# Altium PCB QUTMS-BrakeLight--B00-V00.PcbDoc
Units mil, origin at the board's own origin, x right, y up, seen from the top; angles counter-clockwise.
Board outline 4118.11 x 2444.88 mil, 2 copper layers (Top Layer, Bottom Layer); 33 components, 18 nets, 208 pads, 2 vias.
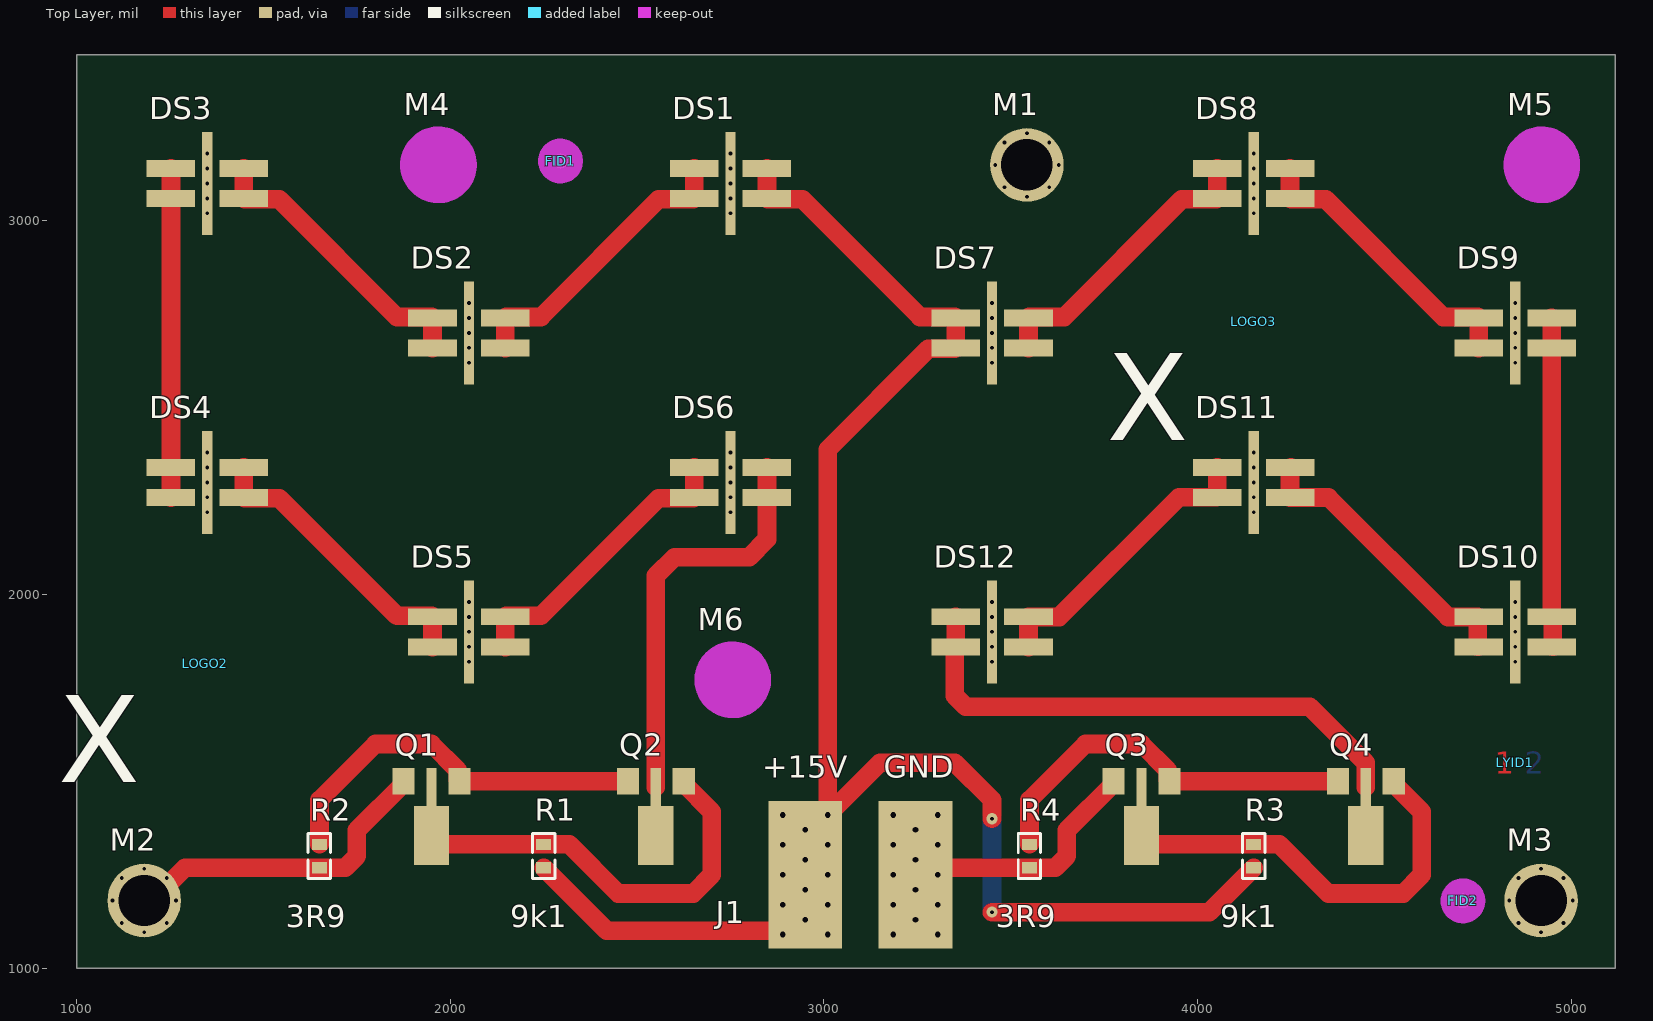
[diagram p0: Top Layer view]
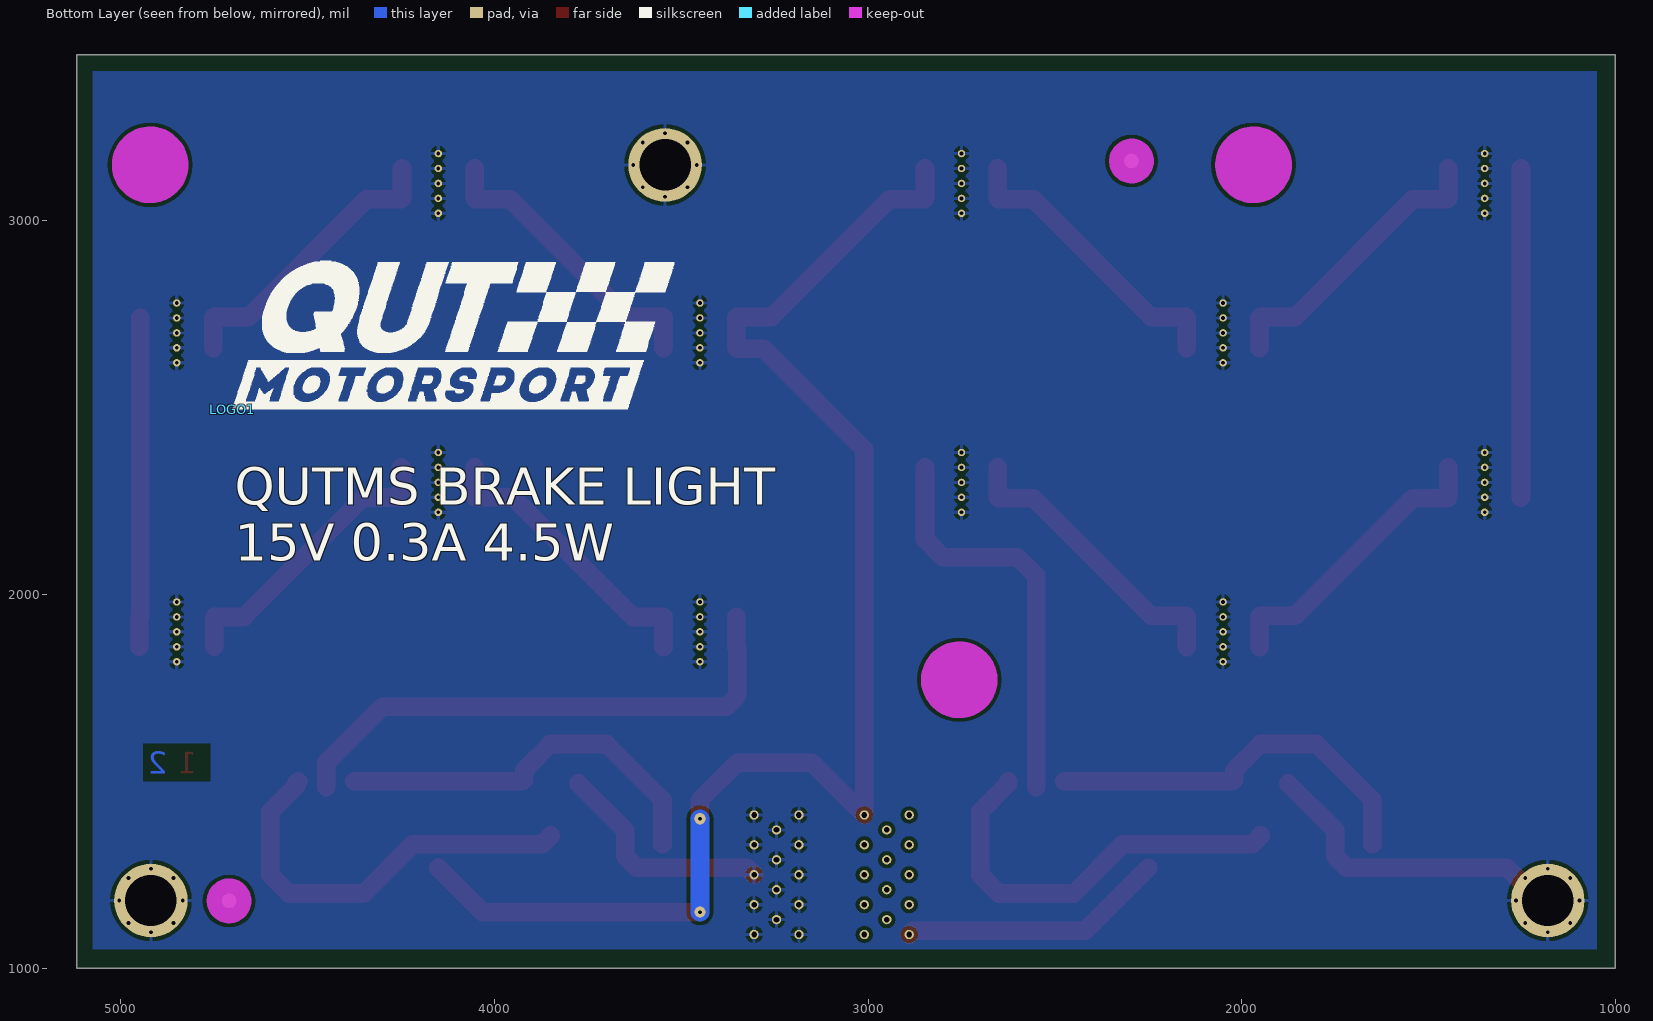
[diagram p1: Bottom Layer view, seen from below]
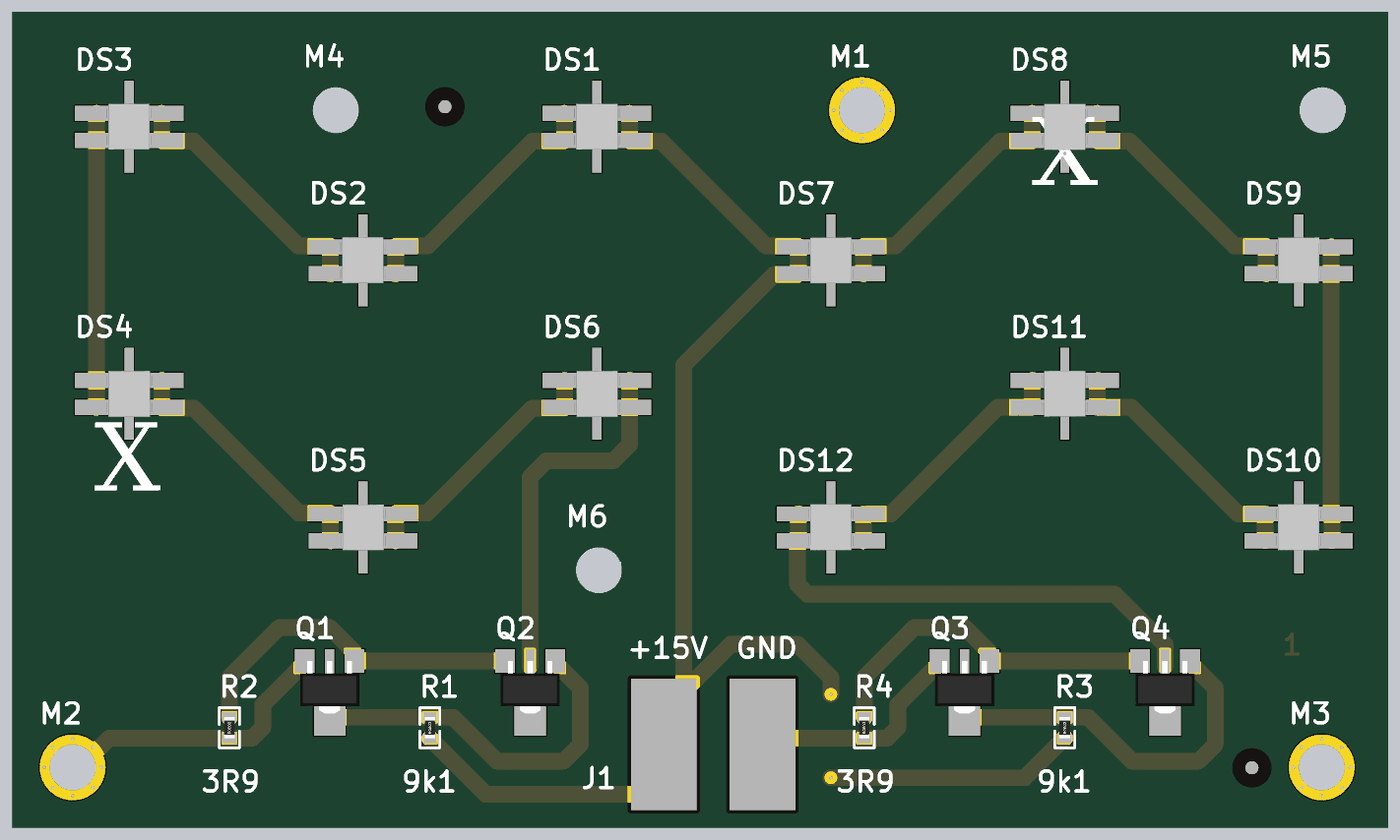
[diagram p2: 3D render of the assembled board from above, using the file's embedded part models]

## Layer stack, top to bottom
Top Solder: solder mask 0.4, Solder Resist, Dk 3.5
Top Layer: signal copper 1.4
Dielectric 1: dielectric 12.6, FR-4, Dk 4.8
Bottom Layer: signal copper 1.4
Bottom Solder: solder mask 0.4, Solder Resist, Dk 3.5

## Board outline
1000,1000 1000,3444.88 5118.11,3444.88 5118.11,1000

## Design rules (kind name [scope] priority, off if disabled: settings)
Clearance [All] p1: gap=10 ignorepadtopadclearanceinfootprint=FALSE except(0: Arc-Hole Track-Hole SMDPad-Hole THPad-Hole Via-Hole Fill-Hole Poly-Hole Region-Hole Text-Hole)
PolygonConnect [All] p1: connectstyle=Relief reliefconductorwidth=10 reliefentries=4 polygonreliefangle="90 Angle" airgapwidth=10
RoutingVias [All] p1: holewidth=28 width=50 viastyle="Through Hole" minholewidth=28 minwidth=50 maxholewidth=28 maxwidth=50
SolderMaskExpansion [All] p1: expansion=4 istentingtop=FALSE
Width [All] p1: maxlimit=100 minlimit=10 preferedwidth=50 minimp=50.000000 maximp=50.000000 favimp=50.000000
30 further rules are at their usual default settings.

## Components (designator, comment, footprint, x,y, rotation, side; value= is the part's Value field where it differs from the comment)
DS1 "Cree XLamp ML-E Red" "CREE XLAMP ML-E" 2750,3100 r180 top
DS2 "Cree XLamp ML-E Red" "CREE XLAMP ML-E" 2050,2700 r180 top
DS3 "Cree XLamp ML-E Red" "CREE XLAMP ML-E" 1350,3100 r180 top
DS4 "Cree XLamp ML-E Red" "CREE XLAMP ML-E" 1350,2300 r0 top
DS5 "Cree XLamp ML-E Red" "CREE XLAMP ML-E" 2050,1900 r0 top
DS6 "Cree XLamp ML-E Red" "CREE XLAMP ML-E" 2750,2300 r0 top
DS7 "Cree XLamp ML-E Red" "CREE XLAMP ML-E" 3450,2700 r0 top
DS8 "Cree XLamp ML-E Red" "CREE XLAMP ML-E" 4150,3100 r0 top
DS9 "Cree XLamp ML-E Red" "CREE XLAMP ML-E" 4850,2700 r0 top
DS10 "Cree XLamp ML-E Red" "CREE XLAMP ML-E" 4850,1900 r180 top
DS11 "Cree XLamp ML-E Red" "CREE XLAMP ML-E" 4150,2300 r180 top
DS12 "Cree XLamp ML-E Red" "CREE XLAMP ML-E" 3450,1900 r180 top
FID1 "Fiducial 1MM" "FIDUCIAL 1MM" 2295,3160 r0 top
FID2 "Fiducial 1MM" "FIDUCIAL 1MM" 4710,1180 r90 top
J1 "15V Input" JUMPER_2WAY_LARGE_SOLDER_PAD 2950,1250 r0 top
LOGO1 "30mm Wide QUTMS Logo" "QUTMS LOGO 30MM" 4700,2495 r180 bottom
LOGO2 "LBL Hot Surface M + TXT" "LBL HOT MEDIUM TXT" 1345,1815 r0 top
LOGO3 "LBL Hot Surface M + TXT" "LBL HOT MEDIUM TXT" 4150,2730 r0 top
LYID1 "2 Layer Identification PCB Marker" "LAYER IDENT 2" 4850,1550 r0 top
M1 "Hole M3 Loose Plated" "M3.5 PLATED" 3543.31,3149.61 r0 top
M2 "Hole M3 Loose Plated" "M3.5 PLATED" 1181.1,1181.1 r0 top
M3 "Hole M3 Loose Plated" "M3.5 PLATED" 4919,1181.1 r0 top
M4 "Hole M3 Loose Unplated" "M3.5 UNPLATED" 1968.5,3149.61 r0 top
M5 "Hole M3 Loose Unplated" "M3.5 UNPLATED" 4921.26,3149.61 r0 top
M6 "Hole M3 Loose Unplated" "M3.5 UNPLATED" 2755.91,1771.65 r0 top
Q1 "BCX55-16TF" SOT89 1950,1500 r180 top
Q2 "BCX55-16TF" SOT89 2550,1500 r180 top
Q3 "BCX55-16TF" SOT89 3850,1500 r180 top
Q4 "BCX55-16TF" SOT89 4450,1500 r180 top
R1 "9k1 5% 0603" Res_ThinFilm_0603 2250,1300 r90 top
R2 "3R9 5% 0603" Res_ThinFilm_0603 1650,1300 r90 top
R3 "9k1 5% 0603" Res_ThinFilm_0603 4150,1300 r90 top
R4 "3R9 5% 0603" Res_ThinFilm_0603 3550,1300 r90 top

## Footprints (in the part's own frame and the unit in brackets; to place one, negate y for a bottom-side part, rotate by r counter-clockwise, add the part's x,y. Pads: shape width x height; smd on the part's side, far side on the other; paste and mask are expansions set on the pad)
"CREE XLAMP ML-E" [mil]
  rect 129.92x45.28 smd: A1(-97.44,40.35) A2(-97.44,-40.35) K1(97.44,40.35) K2(97.44,-40.35)
  rect 27.56x275.59 smd: HS(0,0)
  round 20 hole 10: HS(0,80) HS(0,40) HS(0,0) HS(0,-40) HS(0,-80)
  body extent -68,-69 68,69, height 45
"FIDUCIAL 1MM" [mm]
  round 1 smd mask+1: 1(0,0)
  round 1 smd far side mask+1: 1(0,0)
  Keep-Out Layer circle w1.524: c0,0 r0.762
JUMPER_2WAY_LARGE_SOLDER_PAD [mil]
  round 25 hole 15: 1(-60,-160) 1(-60,-80) 1(-60,0) 1(-60,80) 1(-60,160) 1(0,-120) 1(0,-40) 1(0,40) 1(0,120) 1(60,-160) 1(60,-80) 1(60,0) 1(60,80) 1(60,160) 2(235,-160) 2(235,-80) 2(235,0) 2(235,80) 2(235,160) 2(295,-120) 2(295,-40) 2(295,40) 2(295,120) 2(355,-160) 2(355,-80) 2(355,0) 2(355,80) 2(355,160)
  rect 196.85x393.7 smd mask+10: 1(0,0) 2(295,0)
"LAYER IDENT 2" [mil]
  Top Layer pour cut-out: 190,150
  Top Layer pour cut-out: -90,50 -90,-50 90,-50 90,50
  Top Layer pour cut-out: -10,30
  Top Layer pour cut-out: -20,-5
  Bottom Layer pour cut-out: -90,50 -90,-50 90,-50 90,50
"LBL HOT MEDIUM TXT" [mil]
"M3.5 PLATED" [mil]
  round 20 hole 10: 1(-85,0) 1(-60,-60) 1(-60,60) 1(0,-85) 1(0,85) 1(60,-60) 1(60,60) 1(85,0)
  round 196.85 hole 137.8: 1(0,0)
"M3.5 UNPLATED" [mm]
  round 0 hole 3.5 unplated: 1(0,0)
  Keep-Out Layer circle w2.667: c0,0 r1.27
"QUTMS LOGO 30MM" [mil]
  silkscreen extent -1,1 1182,398
Res_ThinFilm_0603 [mil]
  rect 30x40 smd: 1(-31.24,0) 2(31.24,0)
  silkscreen extent -60,-30 60,30, body extent -31,-16 32,16, height 18
SOT89 [mm]
  rect 1.5x1.8 smd: B3(-1.9,0) E1(1.9,0)
  rect 2.4x4 smd: C2(0,3.683)
  rect 0.7x2.6 smd: C2(0,0.4)
  body extent -2.25,0 2.25,4, height 1.5

## Part data
DS1 DS2 DS3 DS4 DS5 DS6 DS7 DS8 DS9 DS10 DS11 DS12: "MLERED-A1-0000-000V01 -  High Brightness LED, XLamp ML-E Series, Red, 630 nm, 125 °, 18.1 lm, 350 mA"
J1: library part "Jumper 2Way Side Large Solder Pad", "Jumper 2Way Side Large Solderable Pad"
LOGO1: library part "QUTMS Logo 30mm"
LYID1: library part "Layer Identification 2"
M1 M2 M3: "M3.5 Hole, Plated"
M4 M5 M6: "M3.5 Hole, No Plating"
Q1 Q2 Q3 Q4: library part "BJT NPN Transistor", "BCX55-16TF -  Bipolar (BJT) Single Transistor, NPN, 60 V, 155 MHz, 500 mW, 1 A, 100 hFE", ComponentLink1Description=Element14, ComponentLink1URL=https://au.element14.com/nexperia/bcx55-16tf/trans-aec-q101-npn-60v-1a-150deg/dp/3268016
R1 R3: "Resistor, SMD, 9k1, 0.1W, 5%, 0603"
R2 R4: "Resistor, SMD, 3R9, 0.1W, 5%, 0603"

## Via types
v1: diameter 30, hole 10, Top Layer to Bottom Layer, 2 vias

## Nets (pads, with @x,y where several pads share a name; then routed paths per layer and width w, separated by ;. In a path a pad name is that pad's centre, name@x,y a point inside that pad or via, vN(x,y) a via of type N, cw(c..) or ccw(c..) an arc to the next point about the centre after c; other vN are vias at no path point)
+15V: DS1.A1 DS1.A2 DS7.A1 DS7.A2 J1.1 R1.1 R3.1 | length 4534.5
  Top Layer w50: R1.1 2418.76,1100 2880,1100 J1.1@2890,1090 ; DS1.A2 DS1.A1 2849.8,3057.28 2942.72,3057.28 3257.28,2742.72 3350.2,2742.72 DS7.A1 DS7.A2 3350.2,2657.28 3279.29,2657.28 3010,2387.99 3010,1410 3150,1550 3350,1550 3450,1450 v1(3450,1400) ; v1(3450,1150) 4031.24,1150 R3.1
  Bottom Layer w50: v1(3450,1150) v1(3450,1400)
GND: DS1.HS DS2.HS DS3.HS DS4.HS DS5.HS DS6.HS DS7.HS DS8.HS DS9.HS DS10.HS DS11.HS DS12.HS J1.2 M1.1 M2.1 M3.1 Q1.E1 Q3.E1 R2.1 R4.1 | length 1487.6
  Top Layer w20: Q1.E1@1875.2,1494.09 Q1.E1 ; Q3.E1@3775.2,1494.09 Q3.E1
  Top Layer w50: M2.1@1181.1,1181.1 1202.46,1181.1 1290.12,1268.76 R2.1 1718.76,1268.76 1750,1300 1750,1368.9 Q1.E1@1875.2,1494.09 ; J1.2@3305,1250 3323.76,1268.76 R4.1 3618.76,1268.76 3650,1300 3650,1368.9 Q3.E1@3775.2,1494.09
NetDS1_K1: DS1.K1 DS1.K2 DS2.A1 DS2.A2 | length 798.8
  Top Layer w50: DS2.A1 DS2.A2 2149.8,2742.72 2242.72,2742.72 2557.28,3057.28 2650.2,3057.28 DS1.K1 DS1.K2
NetDS2_K1: DS2.K1 DS2.K2 DS3.A1 DS3.A2 | length 798.8
  Top Layer w50: DS3.A2 DS3.A1 1449.8,3057.28 1542.72,3057.28 1857.28,2742.72 1950.2,2742.72 DS2.K2 DS2.K1
NetDS3_K1: DS3.K1 DS3.K2 DS4.A1 DS4.A2 | length 880.7
  Top Layer w50: DS4.A2 DS4.A1 DS3.K1 DS3.K2
NetDS4_K1: DS4.K1 DS4.K2 DS5.A1 DS5.A2 | length 798.8
  Top Layer w50: DS4.K1 DS4.K2 1449.8,2257.28 1542.72,2257.28 1857.28,1942.72 1950.2,1942.72 DS5.A1 DS5.A2
NetDS5_K1: DS5.K1 DS5.K2 DS6.A1 DS6.A2 | length 798.8
  Top Layer w50: DS5.K2 DS5.K1 2149.8,1942.72 2242.72,1942.72 2557.28,2257.28 2650.2,2257.28 DS6.A2 DS6.A1
NetDS6_K1: DS6.K1 DS6.K2 Q2.C2 | length 1096.5
  Top Layer w50: Q2.C2@2550,1484.25 2550,2050 2600,2100 2800,2100 2847.44,2147.44 DS6.K2 DS6.K1
NetDS7_K1: DS7.K1 DS7.K2 DS8.A1 DS8.A2 | length 798.8
  Top Layer w50: DS7.K2 DS7.K1 3549.8,2742.72 3642.72,2742.72 3957.28,3057.28 4050.2,3057.28 DS8.A2 DS8.A1
NetDS8_K1: DS8.K1 DS8.K2 DS9.A1 DS9.A2 | length 798.8
  Top Layer w50: DS8.K1 DS8.K2 4249.8,3057.28 4342.72,3057.28 4657.28,2742.72 4750.2,2742.72 DS9.A1 DS9.A2
NetDS9_K1: DS9.K1 DS9.K2 DS10.A1 DS10.A2 | length 881.4
  Top Layer w50: DS9.K1 DS9.K2 4947.44,1942.56 4950,1940 DS10.A1@4950,1860
NetDS10_K1: DS10.K1 DS10.K2 DS11.A1 DS11.A2 | length 796.4
  Top Layer w50: DS11.A2@4250,2340 4247.44,2337.44 DS11.A1 4350.35,2259.65 4670,1940 4750,1940 DS10.K1@4750,1860
NetDS11_K1: DS11.K1 DS11.K2 DS12.A1 DS12.A2 | length 797.7
  Top Layer w50: DS12.A1 DS12.A2 3547.8,1940 3630,1940 3950,2260 4050.55,2260 4052.56,2262.01 DS11.K2
NetDS12_K1: DS12.K1 DS12.K2 Q4.C2 | length 1452.3
  Top Layer w50: DS12.K2 DS12.K1 3352.36,1859.65 3350,1857.28 3350,1729.29 3379.29,1700 4300,1700 4450,1550 Q4.C2@4450,1484.25
NetQ1_B3: Q1.B3 Q2.E1 R2.2 | length 1062.3
  Top Layer w50: R2.2 1650,1450 1800,1600 1950,1600 2020.28,1529.72 2020.28,1504.53 Q1.B3 Q2.E1
NetQ1_C2: Q1.C2 Q2.B3 R1.2 | length 1117
  Top Layer w50: Q1.C2@1950,1355 1950,1353.48 1972.24,1331.24 R1.2 2318.76,1331.24 2450,1200 2650,1200 2700,1250 2700,1418.9 2624.8,1494.09 Q2.B3
NetQ3_B3: Q3.B3 Q4.E1 R4.2 | length 1062.3
  Top Layer w50: R4.2 3550,1450 3700,1600 3850,1600 3920.28,1529.72 3920.28,1504.53 Q3.B3 Q4.E1
NetQ3_C2: Q3.C2 Q4.B3 R3.2 | length 1117
  Top Layer w50: Q3.C2@3850,1355 3850,1353.48 3872.24,1331.24 R3.2 4218.76,1331.24 4350,1200 4550,1200 4600,1250 4600,1418.9 4529.33,1489.57 4529.33,1495.47 Q4.B3
pads on no net: FID1.1 FID2.1 M4.1 M5.1 M6.1

## Polygon pours and split planes (outlines as drawn)
GND on Bottom Layer "GND_L02_P001" (solid, pour order 1): 5075,1050 5075,3400 1050,3400 1050,1050
no net on Bottom Layer "NONET_L02_P000" (solid, pour order 0): 5045,3375

## Silkscreen, mask and mechanical layers (free items; w line width, h text height)
Top Overlay:
  text "+15V" at 2835,1510 h60
  text "GND" at 3160,1510 h60
  text "3R9" at 1560,1110 h60
  text "9k1" at 2160,1110 h60
  text "3R9" at 3460,1110 h60
  text "9k1" at 4060,1110 h60
Bottom Overlay:
  text "QUTMS BRAKE LIGHT / 15V 0.3A 4.5W" at 4695,2090 h100
Mechanical 1:
  the board outline again, w20

## Text inside footprints (layer, text, board x,y; h text height)
LOGO2: Top Overlay "X" at 951.3,1421.3 h400
LOGO3: Top Overlay "X" at 3756.3,2336.3 h400
LYID1: Top Layer "1" at 4795,1520 h60; Bottom Layer "2" at 4875,1520 h60